# Altium PCB HM_LightSensor.PcbDoc
Units mil, origin at the board's own origin, x right, y up, seen from the top; angles counter-clockwise.
Board outline 767.72 x 472.44 mil, 2 copper layers (Top Layer, Bottom Layer); 5 components, 4 nets, 13 pads, 1 vias.
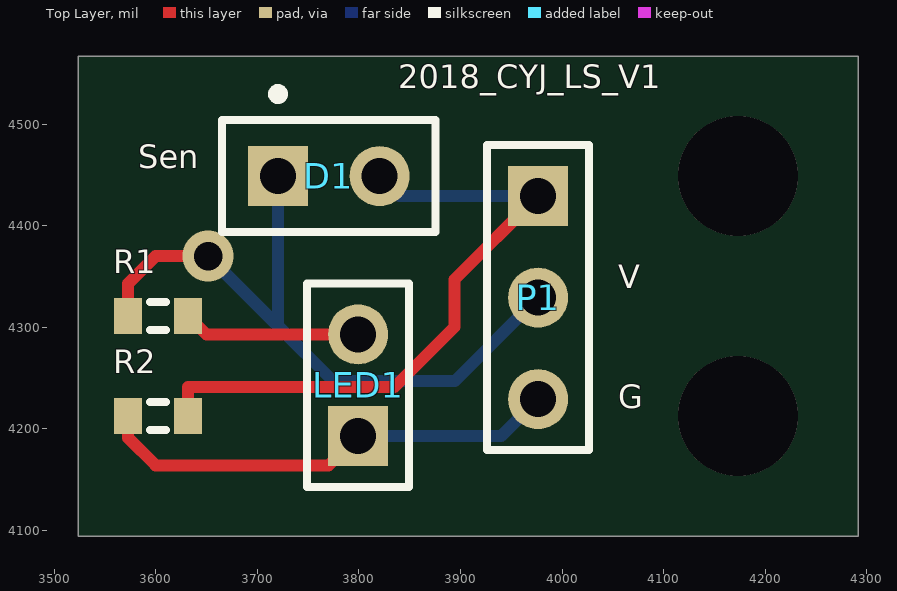
[diagram p0: Top Layer view]
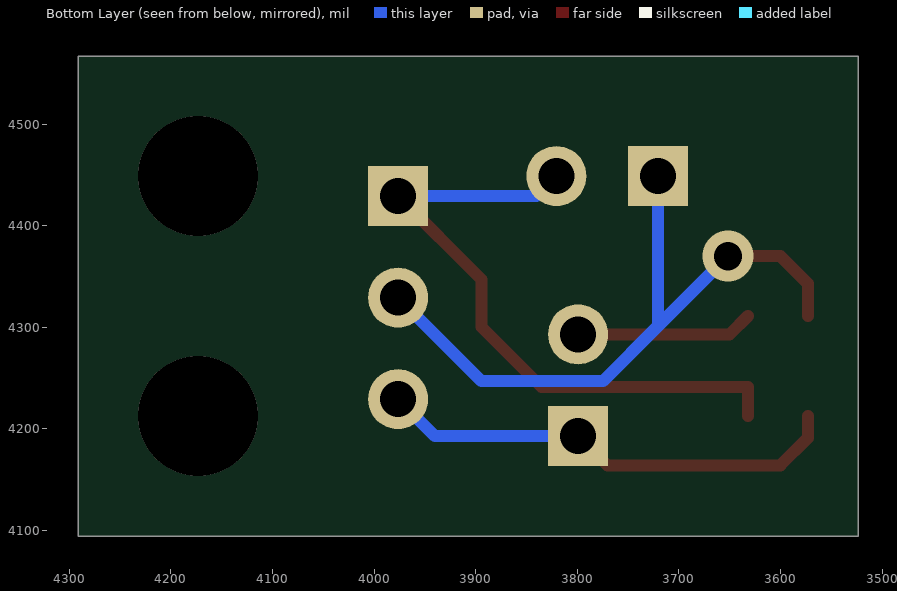
[diagram p1: Bottom Layer view, seen from below]

## Layer stack, top to bottom
Top Solder: solder mask 0.4, Solder Resist, Dk 3.5
Top Layer: signal copper 1.4
Dielectric 1: dielectric 12.6, FR-4, Dk 4.8
Bottom Layer: signal copper 1.4
Bottom Solder: solder mask 0.4, Solder Resist, Dk 3.5

## Board outline
3523.62,4094.49 3523.62,4566.93 4291.34,4566.93 4291.34,4094.49

## Design rules (kind name [scope] priority, off if disabled: settings)
Clearance [All] p1: gap=10
PolygonConnect [All] p1: connectstyle=Relief reliefconductorwidth=10 reliefentries=4 polygonreliefangle="90 Angle" airgapwidth=10
RoutingVias [All] p1: holewidth=28 width=50 viastyle="Through Hole" minholewidth=28 minwidth=50 maxholewidth=28 maxwidth=50
SolderMaskExpansion [All] p1: expansion=4
Width [All] p1: maxlimit=11.81 minlimit=11.81 preferedwidth=11.81 minimp=50.000000 maximp=50.000000 favimp=50.000000
30 further rules are at their usual default settings.

## Components (designator, comment, footprint, x,y, rotation, side; value= is the part's Value field where it differs from the comment)
D1 "Photo Sen" PIN2 3720.47,4448.82 r0 top
LED1 "Header 2" HDR1X2 3799.21,4192.91 r90 top
P1 "Header 3" HDR1X3 3976.38,4429.13 r270 top
R1 "Res3" J1-0603 3602.36,4311.02 r0 top
R2 "Res3" J1-0603 3602.36,4212.6 r0 top

## Footprints (in the part's own frame and the unit in brackets; to place one, negate y for a bottom-side part, rotate by r counter-clockwise, add the part's x,y. Pads: shape width x height; smd on the part's side, far side on the other; paste and mask are expansions set on the pad)
HDR1X2 [mm] "Connector; Header; 2 Position"
  rect 1.5x1.5 hole 0.9: 1(0,0)
  round 1.5 hole 0.9: 2(2.54,0)
  silkscreen extent -1.27,-1.27 3.81,1.27
HDR1X3 [mm] "Connector; Header; 3 Position"
  rect 1.5x1.5 hole 0.9: 1(0,0)
  round 1.5 hole 0.9: 2(2.54,0) 3(5.08,0)
  silkscreen extent -1.27,-1.27 6.35,1.27
J1-0603 [mm] "Chip Resistor, Body 1.6x0.8mm, IPC High Density"
  rect 0.7x0.9 smd: 1(-0.75,0) 2(0.75,0)
  silkscreen extent -0.2,-0.35 0.2,0.35, body extent -0.85,-0.48 0.85,0.48, height 0.9
PIN2 [mm] "Photosensitive Diode; 2 Leads"
  rect 1.5x1.5 hole 0.9: 1(0,0)
  round 1.5 hole 0.9: 2(2.54,0)
  silkscreen extent -1.4,-1.4 3.94,2.17

## Part data
D1: "Photosensitive Diode"
LED1: "Header, 2-Pin"
P1: "Header, 3-Pin"
R1 R2: "Resistor"

## Free pads (board coordinates)
  round 118.11 hole 118.11: 0(4173.23,4212.6) 0(4173.23,4448.82)

## Via types
v1: diameter 50, hole 28, Top Layer to Bottom Layer, 1 vias

## Nets (pads, with @x,y where several pads share a name; then routed paths per layer and width w, separated by ;. In a path a pad name is that pad's centre, name@x,y a point inside that pad or via, vN(x,y) a via of type N, cw(c..) or ccw(c..) an arc to the next point about the centre after c; other vN are vias at no path point)
GND: LED1.1 P1.3 R2.1 | length 463.2
  Top Layer w11.81: R2.1 3572.83,4191.17 3600,4164 3770.3,4164 LED1.1
  Bottom Layer w11.81: LED1.1 3940.16,4192.91 P1.3
NetD1_2: D1.2 P1.1 R2.2 | length 642.3
  Top Layer w11.81: R2.2 3631.89,4241 3835,4241 3894,4300 3894,4346.76 P1.1
  Bottom Layer w11.81: D1.2 3840.16,4429.13 P1.1
NetLED1_2: LED1.2 R1.2 | length 174.8
  Top Layer w11.81: R1.2 3650,4292.91 LED1.2
VCC: D1.1 P1.2 R1.1 | length 679.3
  Top Layer w11.81: R1.1 3572.83,4342.9 3600,4370.07 v1(3651.59,4370.07)
  Bottom Layer w11.81: v1(3651.59,4370.07) 3720.47,4301.18 ; D1.1 3720.47,4301.18 ; P1.2 3894.24,4247 3774.65,4247 3720.47,4301.18
copper on no net: | length 50
  Top Layer w10: 2455,0 2505,0

## Silkscreen, mask and mechanical layers (free items; w line width, h text height)
Top Overlay:
  text "2018_CYJ_LS_V1" at 3838.58,4527.56 h39.37
  text "Sen" at 3582.68,4448.82 h39.37
  text "V" at 4055.12,4330.71 h39.37
  text "G" at 4055.12,4212.6 h39.37
Mechanical 1:
  the board outline again, w10